# EAGLE board ltc2344-16 (EAGLE 9.5.1)
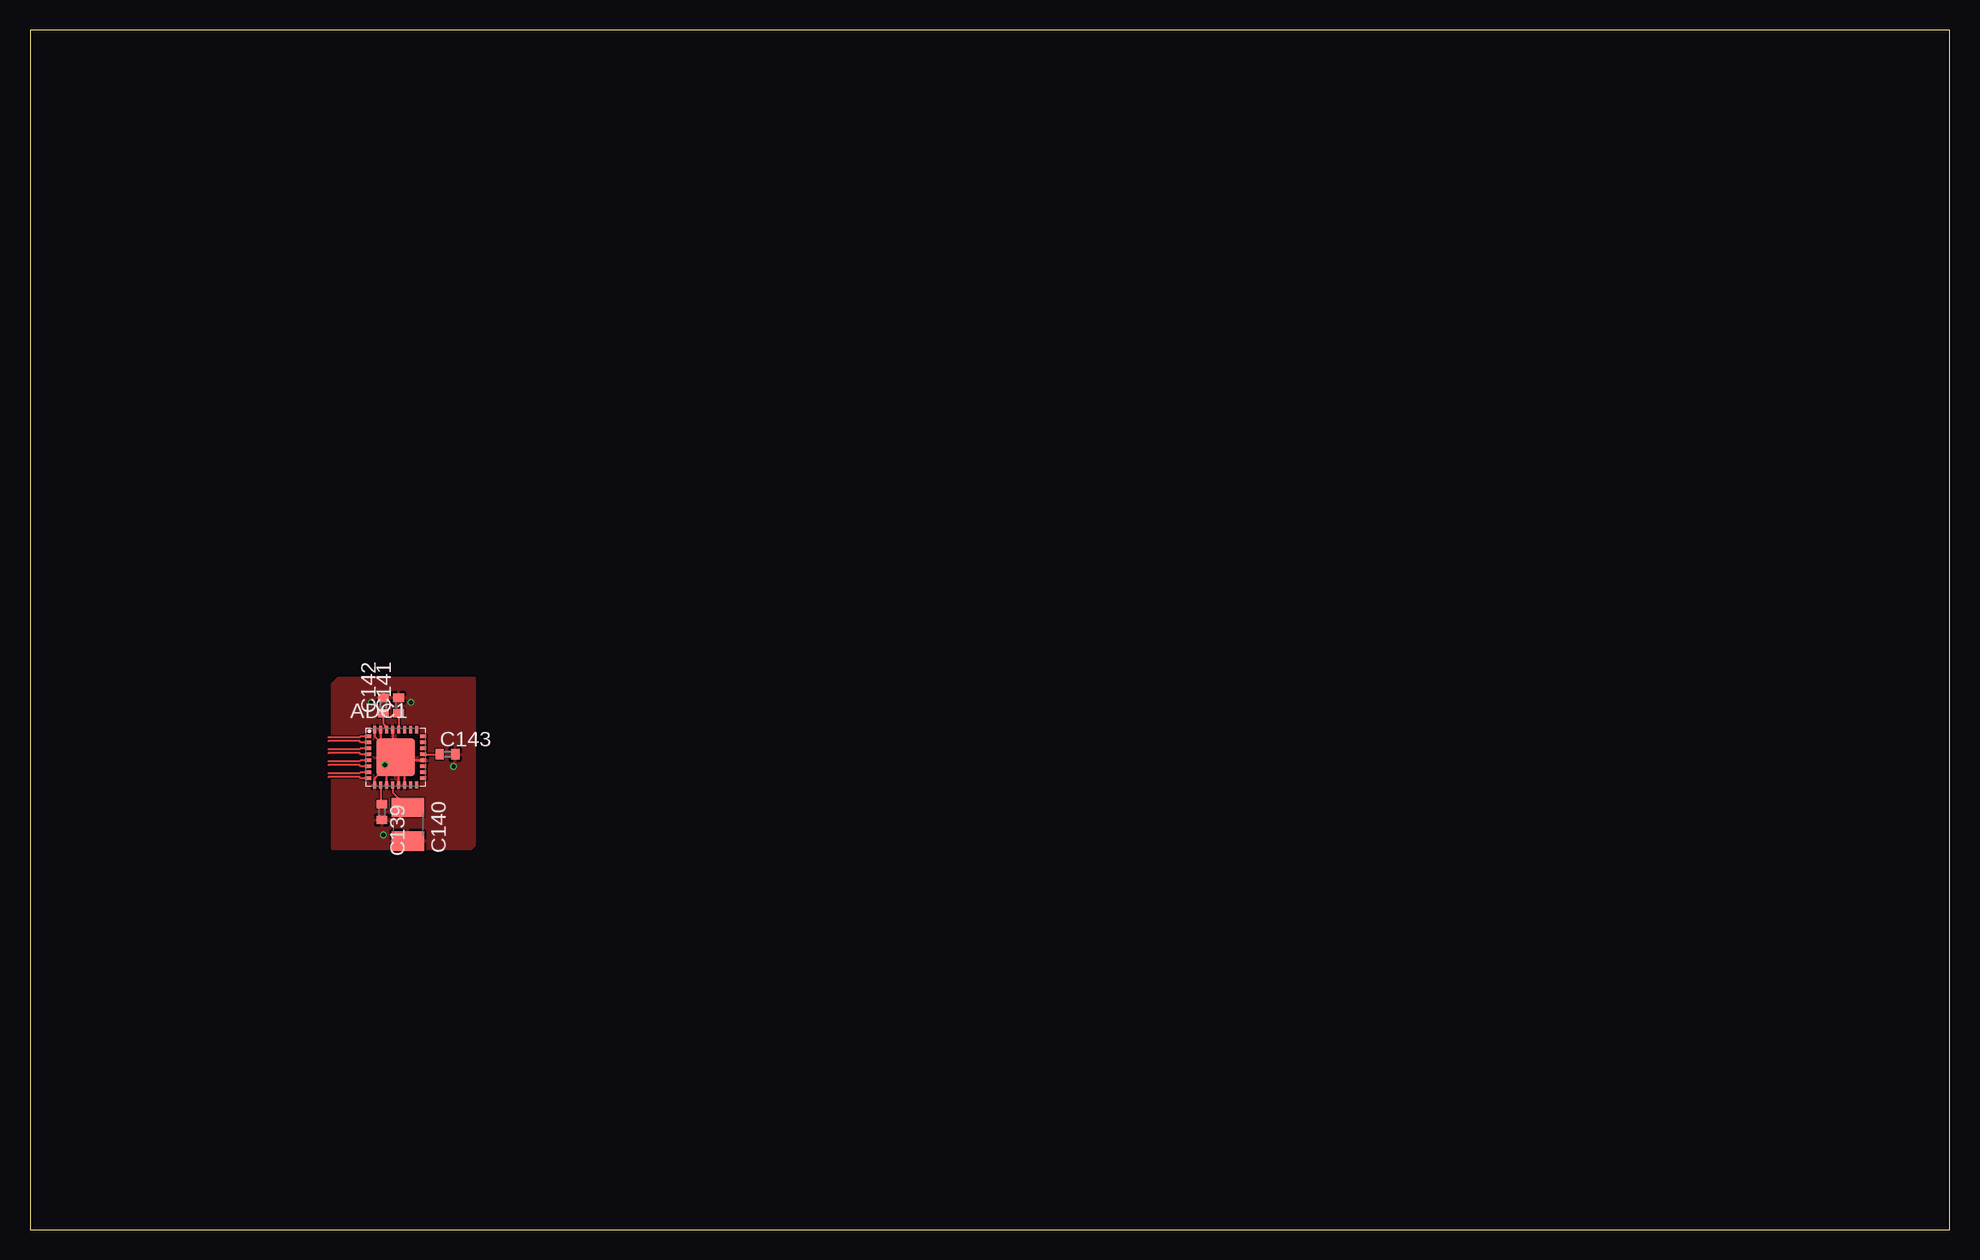
[diagram p0: board, top side]

Size 160 x 100 mm. Coordinates in mm from the lower left corner, seen from the top.
Outline: 0,0 160,0 160,100 0,100 0,0
Copper layers (1+2*3+16): Top 0.012mm / dielectric 0.36mm / Route2 0.018mm / dielectric 0.71mm / Route3 0.018mm / dielectric 0.36mm / Bottom 0.012mm
Design rules "eC_4Layer_PClass8_BaseCopperO12-I18": minimum track width 0.1mm, minimum drill 0.25mm, track to track 0.1mm, track to pad 0.1mm, pad to pad 0.1mm, via to via 0.1mm, smd to smd 0mil, copper to edge 0.25mm, drill to drill 0.35mm, minimum pad ring 0.15mm, minimum via ring 0.1mm, stop-mask expansion 0mil, vias tented up to drill 0.45mm, thermal gap 0.2mm

## Footprints (pad centres in the part's own frame; a part is rotated, then mirrored left to right if it is on the bottom)
QFN32 = smd 0.6 x 0.3: 1 -2.3,1.75; 2 -2.3,1.25; 3 -2.3,0.75; 4 -2.3,0.25; 5 -2.3,-0.25; 6 -2.3,-0.75; 7 -2.3,-1.25; 8 -2.3,-1.75; 17 2.3,-1.75; 18 2.3,-1.25; 19 2.3,-0.75; 20 2.3,-0.25; 21 2.3,0.25; 22 2.3,0.75; 23 2.3,1.25; 24 2.3,1.75 | smd 0.3 x 0.6: 9 -1.75,-2.3; 10 -1.25,-2.3; 11 -0.75,-2.3; 12 -0.25,-2.3; 13 0.25,-2.3; 14 0.75,-2.3; 15 1.25,-2.3; 16 1.75,-2.3; 25 1.75,2.3; 26 1.25,2.3; 27 0.75,2.3; 28 0.25,2.3; 29 -0.25,2.3; 30 -0.75,2.3; 31 -1.25,2.3; 32 -1.75,2.3 | smd 3.2 x 3.2: EXP 0,0
C0402 = smd 0.7 x 0.9: 1 -0.65,0; 2 0.65,0
C1210 = smd 1.6 x 2.7: 1 -1.4,0; 2 1.4,0

## Placement (x,y rotation side)
ADC1  LTC2344-16  [QFN32]  30.48,39.37 0 top
C139  0.1uf  [C0402]  29.34,34.8 270 top
C140  47uf 10V  [C1210]  31.5,33.78 270 top
C141  2.2uf  [C0402]  30.73,43.69 90 top
C142  0.1uf  [C0402]  29.46,43.69 90 top
C143  0.1uf  [C0402]  34.8,39.62 0 top

## Library data of the parts
ADC1 = wouter
C139-C143 = rcl; SPICEPREFIX: C

## Nets
+5V: ADC1.30 C142.1
/CS: ADC1.27
ADIN0_N: ADC1.7
ADIN0_P: ADC1.8
ADIN1_N: ADC1.5
ADIN1_P: ADC1.6
ADIN2_N: ADC1.3
ADIN2_P: ADC1.4
ADIN3_N: ADC1.1
ADIN3_P: ADC1.2
BUSY: ADC1.26
CNV: ADC1.15
GND [power]: ADC1.9 ADC1.11 ADC1.13 ADC1.14 ADC1.20 ADC1.29 ADC1.31 ADC1.32 ADC1.EXP C139.2 C140.2 C141.2 C142.2 C143.2
N$81: ADC1.10 C139.1
N$82: ADC1.12 C140.1
N$83: ADC1.28 C141.1
OVDD: ADC1.21 C143.1
SCKI: ADC1.19
SDI: ADC1.25
SDO0: ADC1.17
SDO1: ADC1.18
SDO2: ADC1.23
SDO3: ADC1.24

## Tracks (layer width: path | path; a pad name or v marks a point on that pad's centre or on a via)
+5V
  Top 0.152: ADC1.30 29.61,41.79 29.61,42.04 29.46,42.18 C142.1
ADIN0_N
  Top 0.152: ADC1.7 27.57,38.12 27.48,38.02 24.89,38.02
ADIN0_P
  Top 0.152: ADC1.8 27.57,37.62 27.48,37.72 24.89,37.72
ADIN1_N
  Top 0.152: ADC1.5 27.57,39.12 27.48,39.02 24.89,39.02
ADIN1_P
  Top 0.152: ADC1.6 27.57,38.62 27.48,38.72 24.89,38.72
ADIN2_N
  Top 0.152: ADC1.3 27.57,40.12 27.48,40.02 24.89,40.02
ADIN2_P
  Top 0.152: ADC1.4 27.57,39.62 27.48,39.72 24.89,39.72
ADIN3_N
  Top 0.152: ADC1.1 27.57,41.12 27.48,41.02 24.89,41.02
ADIN3_P
  Top 0.152: ADC1.2 27.57,40.62 27.48,40.72 24.89,40.72
GND  (via drill 0.35)
  Top 0.152: C140.2 31.5,31.77 | ADC1.29 30.23,39.62 ADC1.EXP | ADC1.31 29.23,40.62 ADC1.EXP | ADC1.32 28.73,41.12 ADC1.EXP | ADC1.13 30.73,39.12 | ADC1.14 31.23,38.62 ADC1.EXP | ADC1.11 29.73,38.62 ADC1.EXP | ADC1.9 28.73,37.62 ADC1.EXP | ADC1.20 30.73,39.12 | 30.73,39.12 ADC1.EXP
  other vias: 29.59,38.73 29.46,32.89 31.75,43.94 28.45,43.94 35.31,38.61
  pour Top: 25.15,45.47 25.15,31.75 36.83,31.75 37.08,32 37.08,45.97 25.65,45.97
N$81
  Top 0.152: ADC1.10 29.23,35.55 C139.1
N$82
  Top 0.152: ADC1.12 30.23,36.45 C140.1
N$83
  Top 0.152: C141.1 ADC1.28
OVDD
  Top 0.152: ADC1.21 C143.1